# Altium PCB PCB1.PcbDoc
Units mm, origin at the board's own origin, x right, y up, seen from the top; angles counter-clockwise.
Board outline 99.06 x 37 mm, 2 copper layers (Top Layer, Bottom Layer); 12 components, 10 nets, 44 pads, 14 vias.
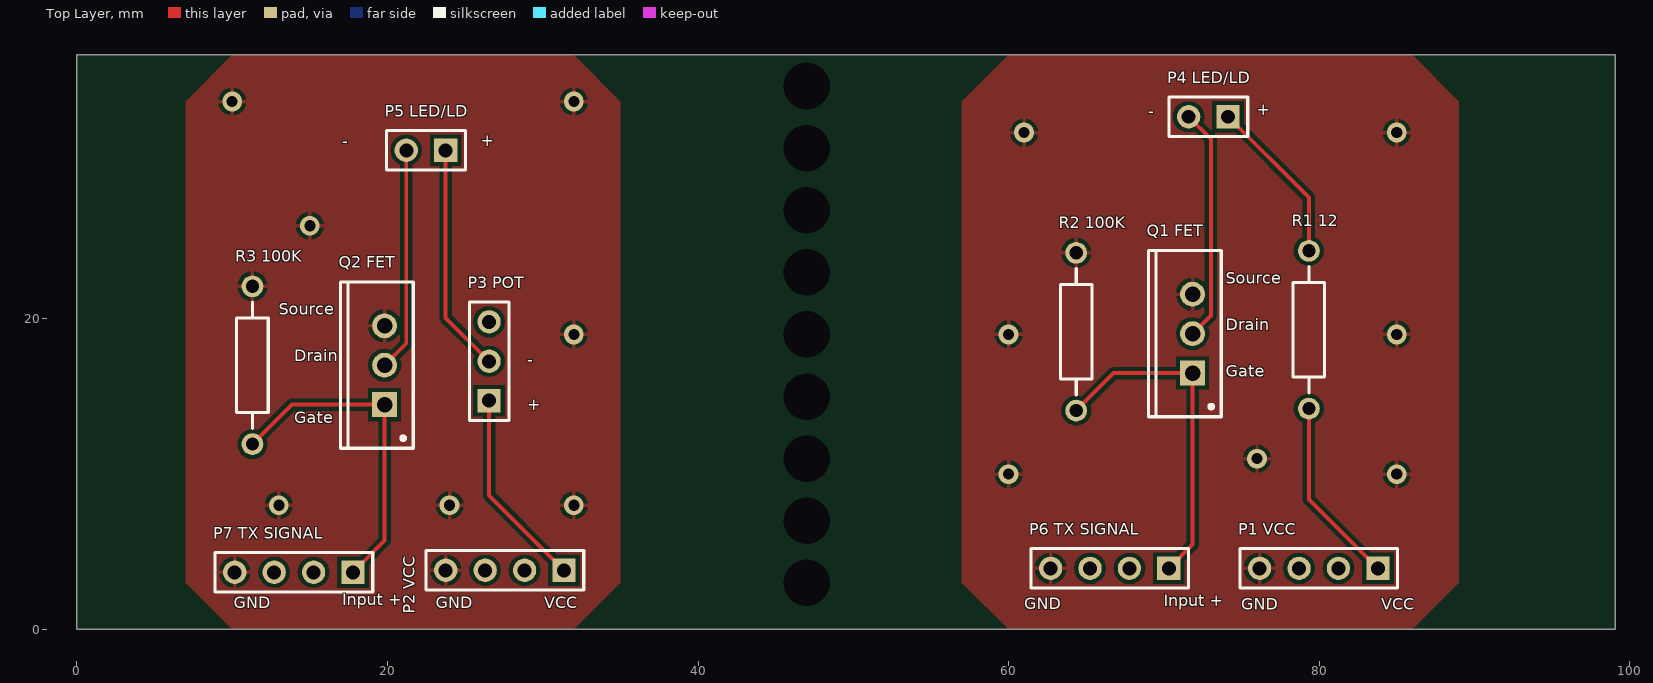
[diagram p0: Top Layer view]
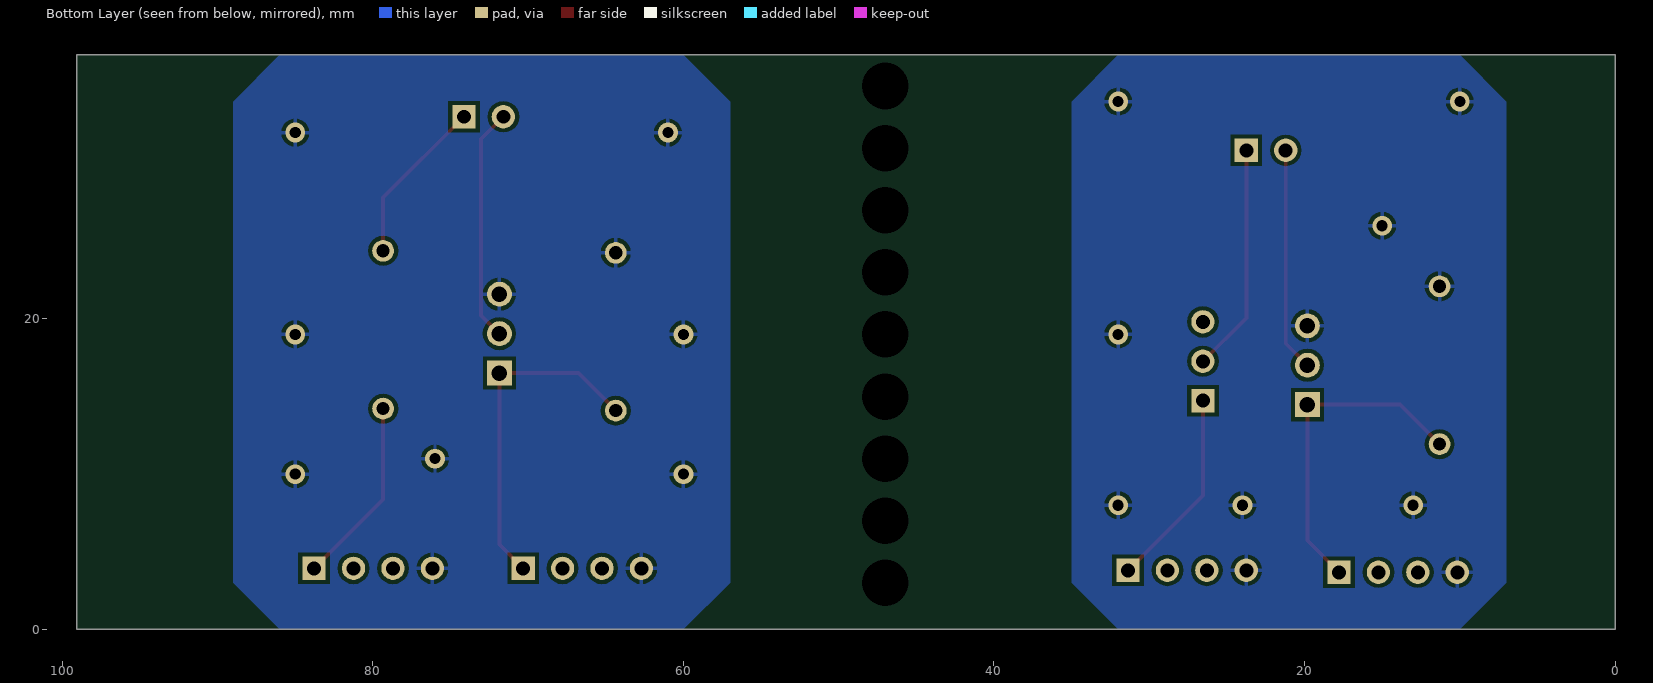
[diagram p1: Bottom Layer view, seen from below]

## Layer stack, top to bottom
Top Solder: solder mask 0.0102, Solder Resist, Dk 3.5
Top Layer: signal copper 0.0356
Dielectric 1: dielectric 0.32, FR-4, Dk 4.8
Bottom Layer: signal copper 0.0356
Bottom Solder: solder mask 0.0102, Solder Resist, Dk 3.5

## Board outline
0,0 99.06,0 99.06,37 0,37

## Design rules (kind name [scope] priority, off if disabled: settings)
Clearance [All] p1: gap=0.254 ignorepadtopadclearanceinfootprint=FALSE except(0: Arc-Hole Track-Hole SMDPad-Hole THPad-Hole Via-Hole Fill-Hole Poly-Hole Region-Hole Text-Hole)
PolygonConnect [All] p1: connectstyle=Relief reliefconductorwidth=0.254 reliefentries=4 polygonreliefangle="90 Angle" airgapwidth=0.254
RoutingVias [All] p1: holewidth=0.711 width=1.27 viastyle="Through Hole" minholewidth=0.711 minwidth=1.27 maxholewidth=0.711 maxwidth=1.27
SolderMaskExpansion [All] p1: expansion=0.102 istentingtop=FALSE
Width [All] p1: maxlimit=0.254 minlimit=0.254 preferedwidth=0.254
30 further rules are at their usual default settings.

## Components (designator, comment, footprint, x,y, rotation, side; value= is the part's Value field where it differs from the comment)
"P1 VCC" "Header 4" HDR1X4 83.788,3.937 r180 top (schematic designator P1)
"P2 VCC" "Header 4" HDR1X4 31.369,3.81 r180 top (schematic designator P2)
"P3 POT" "Header 3" HDR1X3 26.543,14.732 r90 top (schematic designator P3)
"P4 LED/LD" "Header 2" HDR1X2 74.136,33.02 r180 top (schematic designator P4)
"P5 LED/LD" "Header 2" HDR1X2 23.749,30.861 r180 top (schematic designator P5)
"P6 TX SIGNAL" "Header 4" HDR1X4 70.326,3.937 r180 top (schematic designator P6)
"P7 TX SIGNAL" "Header 4" HDR1X4 17.78,3.683 r180 top (schematic designator P7)
"Q1 FET" "NMOS-2" TO-220AB 71.85,19.05 r90 top (schematic designator Q1)
"Q2 FET" "NMOS-2" TO-220AB 19.812,17.018 r90 top (schematic designator Q2)
"R1 12" "Res2" AXIAL-0.4 79.343,19.304 r270 top value=12 (schematic designator R1)
"R2 100K" "Res2" AXIAL-0.4 64.357,19.177 r270 top value=100K (schematic designator R2)
"R3 100K" "Res2" AXIAL-0.4 11.303,17.018 r270 top value=100K (schematic designator R3)

## Footprints (in the part's own frame and the unit in brackets; to place one, negate y for a bottom-side part, rotate by r counter-clockwise, add the part's x,y. Pads: shape width x height; smd on the part's side, far side on the other; paste and mask are expansions set on the pad)
AXIAL-0.4 [mm] "Axial Device, Thru-Hole; 2 Leads; 0.4 in Pin Spacing"
  round 1.4 hole 0.85: 1(-5.08,0) 2(5.08,0)
  silkscreen extent -4.06,-1.02 4.06,1.02
HDR1X2 [mm] "Connector; Header; 2 Position"
  rect 1.5x1.5 hole 0.9: 1(0,0)
  round 1.5 hole 0.9: 2(2.54,0)
  silkscreen extent -1.27,-1.27 3.81,1.27
HDR1X3 [mm] "Connector; Header; 3 Position"
  rect 1.5x1.5 hole 0.9: 1(0,0)
  round 1.5 hole 0.9: 2(2.54,0) 3(5.08,0)
  silkscreen extent -1.27,-1.27 6.35,1.27
HDR1X4 [mm] "Connector; Header; 4 Position"
  rect 1.5x1.5 hole 0.9: 1(0,0)
  round 1.5 hole 0.9: 2(2.54,0) 3(5.08,0) 4(7.62,0)
  silkscreen extent -1.27,-1.27 8.89,1.27
TO-220AB [mm] "TO, Thru-Hole, Vertical, Heatsink Mounted; 3 In-Line Leads; Pitch 2.54 mm"
  rect 1.6x1.6 hole 1: 1(-2.54,0)
  round 1.6 hole 1: 2(0,0) 3(2.54,0)
  silkscreen extent -5.35,-1.85 5.35,2.85, body extent -5.4,-1.9 5.4,2.9, height 19.3

## Part data
"P1 VCC" "P2 VCC" "P6 TX SIGNAL" "P7 TX SIGNAL": "Header, 4-Pin", LatestRevisionDate=17-Jul-2002, LatestRevisionNote="Re-released for DXP Platform.", Publisher="Altium Limited"
"P3 POT": "Header, 3-Pin", LatestRevisionDate=17-Jul-2002, LatestRevisionNote="Re-released for DXP Platform.", Publisher="Altium Limited"
"P4 LED/LD" "P5 LED/LD": "Header, 2-Pin", LatestRevisionDate=17-Jul-2002, LatestRevisionNote="Re-released for DXP Platform.", Publisher="Altium Limited"
"Q1 FET" "Q2 FET": "N-Channel Power MOSFET", ComponentLink1Description="Manufacturer Link", ComponentLink1URL=http://www.irf.com/, DatasheetVersion=PD-9.814, LatestRevisionDate=17-Jul-2002, LatestRevisionNote="Re-released for DXP Platform.", Note="Pin 2 is electrically connected to pin 4.", PackageDescription="TO, Thru-Hole, Vertical, Heatsink Mounted; 3 In-Line Leads; Pitch 2.54 mm", PackageReference=TO-220AB, PackageVersion=Feb-1997, Published=8-Jun-2000, Publisher="Altium Limited"
"R1 12" "R2 100K" "R3 100K": "Resistor", LatestRevisionDate=17-Jul-2002, LatestRevisionNote="Re-released for DXP Platform.", PackageDescription="Axial Device, Thru-Hole; 2 Leads; 0.4 in Pin Spacing", PackageReference=AXIAL-0.4, Published=8-Jun-2000, Publisher="Altium Limited"

## Free pads (board coordinates)
  round 0 hole 3 unplated: 2(47,3) 2(47,7) 2(47,11) 2(47,15) 2(47,19) 2(47,23) 2(47,27) 2(47,31) 2(47,35)

## Via types
v1: diameter 1.27, hole 0.711, Top Layer to Bottom Layer, 14 vias

## Nets (pads, with @x,y where several pads share a name; then routed paths per layer and width w, separated by ;. In a path a pad name is that pad's centre, name@x,y a point inside that pad or via, vN(x,y) a via of type N, cw(c..) or ccw(c..) an arc to the next point about the centre after c; other vN are vias at no path point)
GND1: "P1 VCC.4" "P6 TX SIGNAL.4" "Q1 FET.3" "R2 100K.1"
  other v1: 60,10 85,10 76,11 60,19 85,19 61,32 85,32
GND2: "P2 VCC.4" "P7 TX SIGNAL.4" "Q2 FET.3" "R3 100K.1"
  other v1: 13,8 24,8 32,8 32,19 15,26 10,34 32,34
NetP3_2: "P3 POT.2" "P5 LED/LD.1" | length 14.9
  Top Layer w0.254: 23.749,30.861 23.749,20.066 26.543,17.272 26.416,17.272
NetP4_1: "P4 LED/LD.1" "R1 12.1" | length 10.8
  Top Layer w0.254: 74.136,33.02 79.343,27.813 79.343,24.384
NetP4_2: "P4 LED/LD.2" "Q1 FET.2" | length 15.1
  Top Layer w0.254: 71.596,33.02 73.031,31.585 73.031,20.231 71.85,19.05
NetP5_2: "P5 LED/LD.2" "Q2 FET.2" | length 14.4
  Top Layer w0.254: 19.812,17.018 21.209,18.415 21.209,30.861
NetP6_1: "P6 TX SIGNAL.1" "Q1 FET.1" "R2 100K.2" | length 21.7
  Top Layer w0.254: 64.357,14.097 66.77,16.51 71.85,16.51 71.85,5.461 70.326,3.937
NetP7_1: "P7 TX SIGNAL.1" "Q2 FET.1" "R3 100K.2" | length 21.2
  Top Layer w0.254: 11.303,11.938 13.843,14.478 19.812,14.478 19.812,5.715 17.78,3.683
VCC1: "P1 VCC.1" "R1 12.2" | length 12.1
  Top Layer w0.254: 79.343,14.224 79.343,8.382 83.788,3.937
VCC2: "P2 VCC.1" "P3 POT.1" | length 12.9
  Top Layer w0.254: 26.543,14.732 26.543,8.636 31.369,3.81
pads on no net: "P1 VCC.2" "P1 VCC.3" "P2 VCC.2" "P2 VCC.3" "P3 POT.3" "P6 TX SIGNAL.2" "P6 TX SIGNAL.3" "P7 TX SIGNAL.2" "P7 TX SIGNAL.3"

## Polygon pours and split planes (outlines as drawn)
GND1 on Top Layer "GND1_L01_P004" (solid, pour order 4): 60,37 86,37 89,34 89,3 86,0 60,0 57,3 57,34
no net on Top Layer "NONET_L01_P003" (solid, pour order 3): 59,37
GND2 on Top Layer "GND2_L01_P002" (solid, pour order 2): 35,34 35,3 32,0 10,0 7,3 7,34 10,37 32,37
GND1 on Bottom Layer "GND1_L02_P008" (solid, pour order 8): 60,37 86,37 89,34 89,3 86,0 60,0 57,3 57,34
GND2 on Bottom Layer "GND2_L02_P005" (solid, pour order 5): 35,34 35,3 32,0 10,0 7,3 7,34 10,37 32,37

## Silkscreen, mask and mechanical layers (free items; w line width, h text height)
Top Overlay:
  text "+" at 76,32.865 h1.3
  text "-" at 69,32.75 h1.3
  text "+" at 26,30.865 h1.3
  text "-" at 17.093,30.829 h1.3
  text "Source" at 74,22.014 h1.3
  text "Source" at 13,20.014 h1.3
  text "Drain" at 74,19.013 h1.3
  text "Drain" at 14,17.013 h1.3
  text "-" at 29,16.75 h1.3
  text "Gate" at 74,16.014 h1.3
  text "+" at 29,13.865 h1.3
  text "Gate" at 14,13.014 h1.3
  text "Input +" at 17.093,1.309 h1.3
  text "Input +" at 70,1.231 h1.3
  text "GND" at 10.093,1.093 h1.3
  text "GND" at 23.093,1.093 h1.3
  text "VCC" at 30.094,1.093 h1.3
  text "GND" at 60.995,1.044 h1.3
  text "GND" at 75,1.014 h1.3
  text "VCC" at 84.001,1.014 h1.3
Mechanical 15:
  lines w0.254: 47,0 47,37